# Altium PCB PCB1.PcbDoc
Units mm, origin at the board's own origin, x right, y up, seen from the top; angles counter-clockwise.
Board outline 16.51 x 6.44 mm, 2 copper layers (Top Layer, Bottom Layer), stack 1.18 mm thick; 1 components, 2 nets, 4 pads, 64 vias.
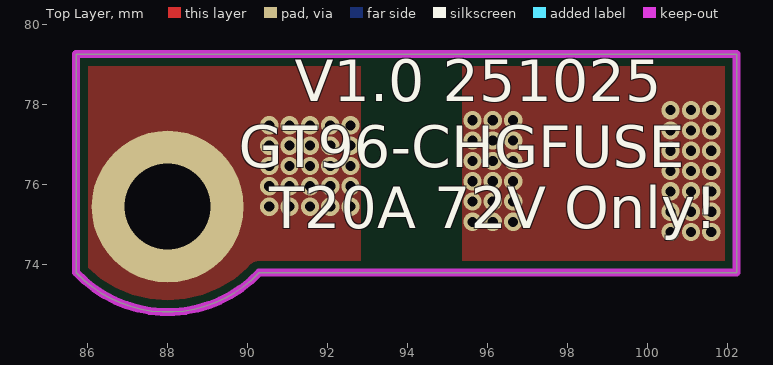
[diagram p0: Top Layer view]
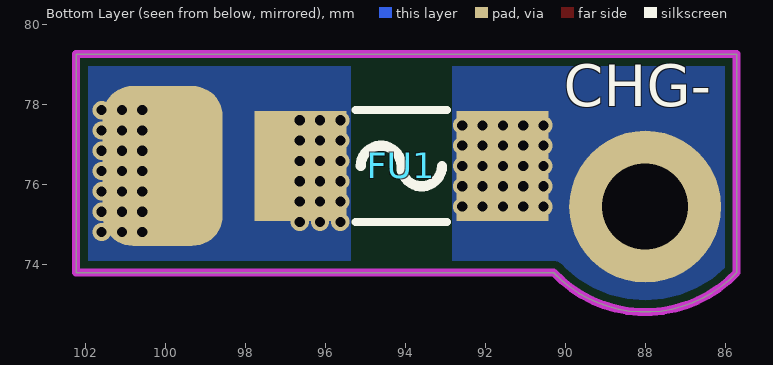
[diagram p1: Bottom Layer view, seen from below]

## Layer stack, top to bottom
Top Solder: solder mask 0.0102, Solder Resist, Dk 3.5
Top Layer: signal copper 0.0356
Dielectric 1: dielectric 1.1086, FR-4, Dk 4.8
Bottom Layer: signal copper 0.0356
Bottom Solder: solder mask 0.0102, Solder Resist, Dk 3.5

## Board outline
85.725,73.787 ccw(c88.011,75.946) 90.297,73.787 102.235,73.787 102.235,79.248 85.725,79.248

## Design rules (kind name [scope] priority, off if disabled: settings)
Clearance [All] p1: gap=0.191
PolygonConnect [All] p1: connectstyle=Direct reliefconductorwidth=0.254 reliefentries=4 polygonreliefangle="90 Angle" airgapwidth=0.254
RoutingVias [All] p1: holewidth=0.711 width=1.27 viastyle="Through Hole" minholewidth=0.711 minwidth=1.27 maxholewidth=0.711 maxwidth=1.27
SolderMaskExpansion [All] p1: expansion=0.102
Width [All] p1: maxlimit=0.254 minlimit=0.254 preferedwidth=0.254
30 further rules are at their usual default settings.

## Components (designator, comment, footprint, x,y, rotation, side; value= is the part's Value field where it differs from the comment)
FU1 "1812尺寸一次性慢熔保险丝 20A 72V" Fuse6126 94.107,76.454 r0 bottom

## Footprints (in the part's own frame and the unit in brackets; to place one, negate y for a bottom-side part, rotate by r counter-clockwise, add the part's x,y. Pads: shape width x height; smd on the part's side, far side on the other; paste and mask are expansions set on the pad)
Fuse6126 [mm] "LittleFuse, 2-Leads, Body 6.20x2.60mm, IPC Medium Density"
  rect 2.3x2.75 smd: 1(-2.525,0) 2(2.525,0)
  silkscreen extent -1.14,-1.4 1.14,1.4, body extent -3.15,-1.4 3.15,1.4, height 2.8

## Free pads (board coordinates)
  round 3.8 hole 2.15 mask+0.03: 0(88.011,75.438)
  rrect50% 3x4 smd far side mask+0.03: 1(100.076,76.454)

## Via types
v1: diameter 0.457, hole 0.254, Top Layer to Bottom Layer, tented both sides, 64 vias

## Nets (pads, with @x,y where several pads share a name; then routed paths per layer and width w, separated by ;. In a path a pad name is that pad's centre, name@x,y a point inside that pad or via, vN(x,y) a via of type N, cw(c..) or ccw(c..) an arc to the next point about the centre after c; other vN are vias at no path point)
CHG-: FU1.1 pad.0
  other v1: 90.551,75.438 91.059,75.438 91.567,75.438 92.075,75.438 92.583,75.438 90.551,75.946 91.059,75.946 91.567,75.946 92.075,75.946 92.583,75.946 90.551,76.454 91.059,76.454 91.567,76.454 92.075,76.454 92.583,76.454 90.551,76.962 91.059,76.962 91.567,76.962 92.075,76.962 92.583,76.962 90.551,77.47 91.059,77.47 91.567,77.47 92.075,77.47 92.583,77.47
P-: FU1.2 pad.1
  other v1: 100.584,74.803 101.092,74.803 101.6,74.803 95.631,75.057 96.139,75.057 96.647,75.057 100.584,75.311 101.092,75.311 101.6,75.311 95.631,75.565 96.139,75.565 96.647,75.565 100.584,75.819 101.092,75.819 101.6,75.819 95.631,76.073 96.139,76.073 96.647,76.073 100.584,76.327 101.092,76.327 101.6,76.327 95.631,76.581 96.139,76.581 96.647,76.581 100.584,76.835 101.092,76.835 101.6,76.835 95.631,77.089 96.139,77.089 96.647,77.089 100.584,77.343 101.092,77.343 101.6,77.343 95.631,77.597 96.139,77.597 96.647,77.597 100.584,77.851 101.092,77.851 101.6,77.851

## Polygon pours and split planes (outlines as drawn)
P- on Top Layer "Component Side-No Net 1" (solid, remove dead copper, pour order 8): 95.377,79.248 95.377,73.787 102.235,73.787 102.235,79.248
CHG- on Top Layer "Component Side-No Net 1" (solid, remove dead copper, pour order 2): 92.837,79.248 92.837,73.787 92.837,73.533 92.075,72.771 85.471,72.771 85.471,79.248
P- on Bottom Layer "Component Side-No Net 1" (solid, remove dead copper, pour order 6): 95.377,79.248 95.377,73.787 102.235,73.787 102.235,79.248
CHG- on Bottom Layer "Component Side-No Net 1" (solid, remove dead copper, pour order 4): 92.837,79.248 92.837,73.787 92.837,73.406 92.202,72.771 92.075,72.644 85.852,72.644 85.852,72.771 85.725,72.898 85.725,79.248

## Keep-outs
Keep-Out Layer:
  the board outline again, w0.2

## Silkscreen, mask and mechanical layers (free items; w line width, h text height)
Top Overlay:
  text "V1.0 251025" at 91.186,77.724 h1.78
  text "GT96-CHGFUSE" at 89.789,76.073 h1.78
  text "T20A 72V Only!" at 90.551,74.549 h1.78
Bottom Overlay:
  text "CHG-" at 90.043,77.597 h1.78